# Altium PCB STDC14 Breakout.PcbDoc
Units mil, origin at the board's own origin, x right, y up, seen from the top; angles counter-clockwise.
Board outline 607 x 613 mil, 2 copper layers (Top Layer, Bottom Layer), stack 61.756 mil thick; 4 components, 14 nets, 28 pads, 0 vias.
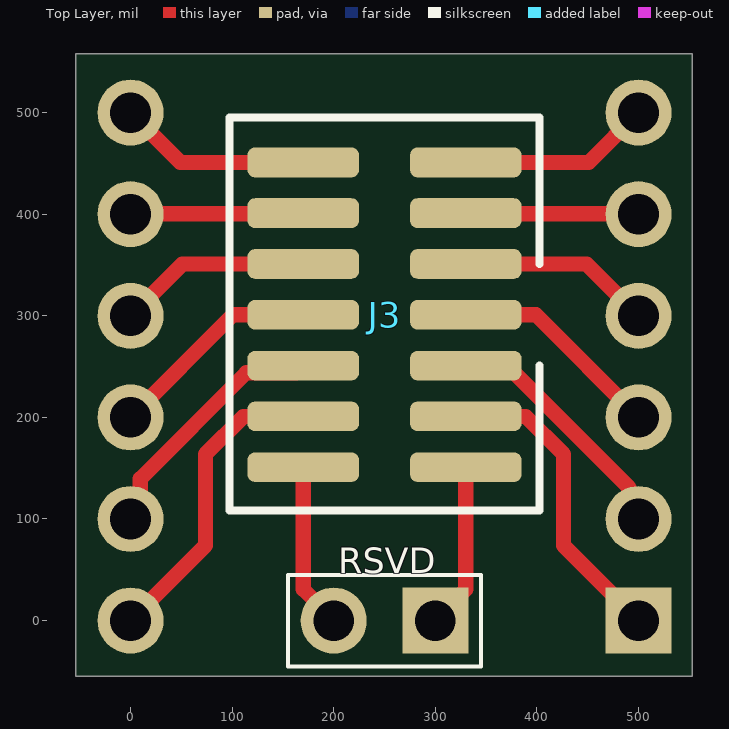
[diagram p0: Top Layer view]
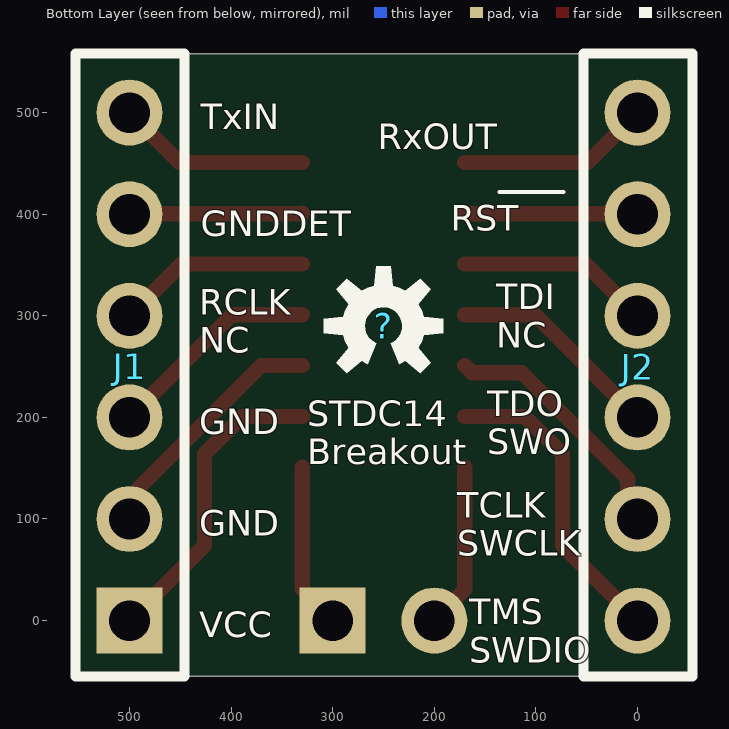
[diagram p1: Bottom Layer view, seen from below]

## Layer stack, top to bottom
Top Solder: solder mask 1, PSR-4000BN, Dk 4.5
Top Layer: signal copper 1.378
Dielectric 1: core 59, Kingboard KB6167F, Dk 4.5
Bottom Layer: signal copper 1.378
Bottom Solder: solder mask 1, PSR-4000BN, Dk 4.5

## Board outline
-54,-55 -54,558 553,558 553,-55

## Design rules (kind name [scope] priority, off if disabled: settings)
BoardOutlineClearance [All] p1: gap=7.87 ignorepadtopadclearanceinfootprint=FALSE
Clearance [All] p1: gap=5 ignorepadtopadclearanceinfootprint=FALSE except(9.84: Arc-Hole Track-Hole SMDPad-Hole THPad-Hole Via-Hole Fill-Hole Poly-Hole Region-Hole Text-Hole)
ComponentClearance [All] p1: gap=5 collisioncheckmode=3 verticalgap=5 showdistances=TRUE
DiffPairsRouting [All] p1: maxlimit=10 minlimit=5 mostfreqgap=5 toplayer_minwidth=5 toplayer_maxwidth=1000 toplayer_prefwidth=5 bottomlayer_minwidth=5 bottomlayer_maxwidth=1000 bottomlayer_prefwidth=5 maxuncoupledlength=500
Height [All] p1: minheight=0 maxheight=71497.94 prefheight=500
HoleSize [All] p1: absolutevalues=TRUE maxlimit=248.03 minlimit=11.81 maxpercent=80.000 minpercent=20.000
HoleToHoleClearance [All] p1: gap=9.84 allowstackedmicrovias=FALSE
MinimumAnnularRing [All] p1: minimumring=3
MinimumSolderMaskSliver [All] p1: minsoldermaskwidth=0
PlaneClearance [All] p1: clearance=5
PlaneConnect PlaneConnectPowerPads [InPadClass('PowerPads')] p1: planeconnectstyle=Direct reliefexpansion=20 reliefentries=4 reliefconductorwidth=10 reliefairgap=10
PlaneConnect [All] p2: pad.planeconnectstyle=Relief pad.reliefexpansion=11.81 pad.reliefentries=4 pad.reliefconductorwidth=5 pad.reliefairgap=5 via.planeconnectstyle=Direct via.reliefexpansion=11.81 via.reliefentries=4 via.reliefconductorwidth=5 via.reliefairgap=5
PolygonConnect PolygonConnectPowerPads [All vs (InPadClass('PowerPads'))] p1: connectstyle=Direct reliefconductorwidth=10 reliefentries=4 polygonreliefangle="90 Angle" airgapwidth=10
PolygonConnect [All] p2: thpad.connectstyle=Relief thpad.reliefconductorwidth=5 thpad.reliefentries=4 thpad.polygonreliefangle="90 Angle" thpad.airgapwidth=5 smdpad.connectstyle=Relief smdpad.reliefconductorwidth=5 smdpad.reliefentries=4 smdpad.polygonreliefangle="90 Angle" smdpad.airgapwidth=5 via.connectstyle=Direct via.reliefconductorwidth=5 via.reliefentries=4 via.polygonreliefangle="90 Angle" via.airgapwidth=5
RoutingVias [All] p1: holewidth=11.81 width=23.62 viastyle="Through Hole" minholewidth=11.81 minwidth=23.62 maxholewidth=23.62 maxwidth=259.84
SilkToSilkClearance [All] p1: silktosilkclearance=0
SilkToSolderMaskClearance [IsPad] p1: minsilkscreentomaskgap=5 clearancetoexposedcopper=TRUE
SolderMaskExpansion [All] p1: expansion=2.95 istentingtop=FALSE
Width [All] p1: maxlimit=1000 minlimit=5 preferedwidth=5 minimp=50.000000 maximp=50.000000 favimp=50.000000
20 further rules are at their usual default settings.

## Classes and differential pairs
component class "Top Sheet": J1 J2 J3

## Components (designator, comment, footprint, x,y, rotation, side; value= is the part's Value field where it differs from the comment)
? "Comment" OSHW-LOGO-S 250,290 r180 bottom
J1 "6 contacts Male header" PH1-06-UA#1 500,0 r90 bottom
J2 "6 contacts Male header" PH1-06-UA#2 0,0 r90 bottom
J3 "STDC14 Debug Connector" "FTSH-107-01-F-DV-K PLUGOUT" 250,251 r90 top

## Footprints (in the part's own frame and the unit in brackets; to place one, negate y for a bottom-side part, rotate by r counter-clockwise, add the part's x,y. Pads: shape width x height; smd on the part's side, far side on the other; paste and mask are expansions set on the pad)
"FTSH-107-01-F-DV-K PLUGOUT" [mil]
  rrect50% 29.13x109.84 smd: 1(-100,-80) 2(-100,80) 3(-50,-80) 4(-50,80) 5(0,-80) 6(0,80) 7(50,-80) 8(50,80) 9(100,-80) 10(100,80)
  rrect50% 29.5x109.84 smd: 11(150,-80) 12(150,80) 13(200,-80) 14(200,80)
  silkscreen extent -143,-153 244,153, body extent -207,-115 308,310, height 315
OSHW-LOGO-S [mil]
  silkscreen extent -59,-47 59,59
PH1-06-UA#1 [mil]
  rect 65x65 hole 40: 1(0,0)
  round 65 hole 40: 2(100,0) 3(200,0) 4(300,0) 5(400,0) 6(500,0)
  silkscreen extent -55,-54 558,53, body extent -50,-49 550,49, height 335
PH1-06-UA#2 [mil]
  round 65 hole 40: 1(0,0) 2(100,0) 3(200,0) 4(300,0) 5(400,0) 6(500,0)
  silkscreen extent -55,-54 558,53, body extent -50,-49 550,49, height 335

## Part data
J1 J2: library part PH1-06-UA, "Connector Male Header 1X6 6contacts 0.100in pitch Gold Flash", Manufacturer="Adam Tech", PCB Package="1x6 THT", Supplier Part Number 1=2057-PH1-06-UA-ND, ComponentLink1Description="Manufacturer Website", ComponentLink1URL=http://www.adam-tech.com/, ComponentLink2Description="Component Datasheet", ComponentLink2URL=http://www.adam-tech.com/downloader.php?p=PH1-XX-UA.pdf, Contact Finish=Gold, Description in Visual="Con Hdr Male 6contacts vertical 1x6", Gender=Male, Manufacturer P/N=PH1-06-UA, Number of Contacts=6, Number of Rows=1, Orientation=vertical, P/N=PH1-06-UA, Pitch=0.100in, Supplier 1=Digi-Key, Supplier 2=Digi-Key, Supplier Part Number 2=732-5319-ND
J3: library part STDC14-Debug, "STDC14 Debug Connector (ST Micro extension to the Cortex 10 Pin), 0.050\" (1.27mm) Pitch", Manufacturer=Samtec, Manufacturer P/N=FTSH-107-01-F-DV-K, Supplier Part Number 1=SAM13170TR-ND, ComponentLink1Description="Pinout Reference", ComponentLink1URL=https://www.st.com/resource/en/user_manual/dm00526767-stlinkv3set-debuggerprogrammer-for-stm8-and-stm32-stmicroelectronics.pdf, ComponentLink2Description="Datasheet for Connector", ComponentLink2URL=http://suddendocs.samtec.com/catalog_english/ftsh_smt.pdf, Contact Finish=Gold, Description in Visual="STDC14 Debug Connector (ST Micro extension to the Cortex 10 Pin), 0.050\" (1.27mm) Pitch", Gender=Male, Number of Contacts=14, Number of Rows=2, Orientation=Vertical, P/N=STDC14-Debug, Pitch="0.050\"", Supplier 1=Digi-Key, Supplier 2=Digi-Key, Supplier 3=Digi-Key, Supplier Part Number 2=612-FTSH-107-01-F-DV-K-ND, Supplier Part Number 3=FTSH-107-01-F-DV-K-P-ND

## Free pads (board coordinates)
  rect 65x65 hole 40: 1(300,0)
  round 65 hole 40: 2(200,0)

## Nets (pads, with @x,y where several pads share a name; then routed paths per layer and width w, separated by ;. In a path a pad name is that pad's centre, name@x,y a point inside that pad or via, vN(x,y) a via of type N, cw(c..) or ccw(c..) an arc to the next point about the centre after c; other vN are vias at no path point)
\RST: J2.5 J3.12 | length 170.4
  Top Layer w15: J2.5 0.5,400.5 169.5,400.5 J3.12
GDT: J1.5 J3.11 | length 170.4
  Top Layer w15: J3.11 330.5,400.5 499.5,400.5 J1.5
GN1: J1.2 J3.5 | length 245.1
  Top Layer w15: J3.5 370.35,251 490.43,130.92 490.43,109.57 J1.2
GN2: J1.3 J3.7 | length 211.8
  Top Layer w15: J3.7 399,301 J1.3
NC1: J3.1 pad.1 | length 163.4
  Top Layer w15: pad.1 300,0.81 330,30.81 J3.1
NC2: J3.2 pad.2 | length 163.4
  Top Layer w15: J3.2 170,30.81 200,0.81 pad.2
RCK: J1.4 J3.9 | length 191.1
  Top Layer w15: J3.9 449,351 J1.4
RxO: J2.6 J3.14 | length 190.3
  Top Layer w15: J2.6 49,451 J3.14
TCK: J2.2 J3.6 | length 250.1
  Top Layer w15: J2.2 9.57,109.57 9.57,139.57 113.93,243.93 162.93,243.93 J3.6
TDI: J2.4 J3.10 | length 191.1
  Top Layer w15: J2.4 51,351 J3.10
TDO: J2.3 J3.8 | length 211.8
  Top Layer w15: J2.3 101,301 J3.8
TMS: J2.1 J3.4 | length 306
  Top Layer w15: J2.1 73.79,73.79 73.79,163.79 111,201 J3.4
TxI: J1.6 J3.13 | length 190.3
  Top Layer w15: J3.13 451,451 J1.6
VCC: J1.1 J3.3 | length 306
  Top Layer w15: J3.3 389,201 426.21,163.79 426.21,73.79 J1.1

## Silkscreen, mask and mechanical layers (free items; w line width, h text height)
Top Overlay:
  lines w4: 155,-45 155,45 345,45 345,-45 155,-45
  text "RSVD" at 204.28,46.72 h25
Bottom Overlay:
  lines w4: 73,422 136,422
  text "TxIN" at 430,483.5 h25
  text "RxOUT" at 255.7,463.71 h25
  text "RST" at 183.69,383.5 h25
  text "GNDDET" at 430,378.5 h25
  text "TDI / NC" at 139.18,268.71 h25
  text "RCLK / NC" at 431.49,263.71 h25
  text "GND" at 431.49,183.5 h25
  text "TDO / SWO" at 148.1,163.71 h25
  text "STDC14 / Breakout" at 324.88,153.71 h25
  text "GND" at 431.49,83.5 h25
  text "TCLK / SWCLK" at 177.62,63.71 h25
  text "VCC" at 431.49,-16.5 h25
  text "TMS / SWDIO" at 165.6,-41.29 h25
Board Outline:
  the board outline again, w1
CAM Title Block:
  drawing of 59 lines, arcs and shapes, not listed
  text "1" at -1544.29,7251.6 h48.36
  text "2" at 1198.83,7251.6 h48.36
  text "3" at 3951.96,7251.6 h48.36
  text "4" at 6697.58,7251.6 h48.36
  text "A" at -2817.46,6289.46 h48.36
  text "A" at 7983.26,6289.46 h48.36
  text "B" at -2812.46,4164.25 h48.36
  text "B" at 7987.43,4164.25 h48.36
  text "C" at -2813.3,2039.88 h48.36
  text "C" at 7986.6,2039.88 h48.36
  text "D" at -2815.8,-85.33 h48.36
  text "D" at 7984.1,-85.33 h48.36
  text "Title:" at 4394.69,-166.2 h65.87
  text "'.Pcb_File_Name_No_Path'" at 4744.88,-187.32 h63.36
  text "*" at 4644.83,-280.42 h32.52
  text "*" at 4644.83,-340.45 h32.52
  text "Desc:" at 4394.69,-352.96 h42.52
  text "*" at 4644.83,-400.48 h32.52
  text "Letter" at 4594.8,-548.06 h42.52
  text "Auth:" at 4995.01,-548.06 h42.52
  text "Proj:" at 6094.76,-548.06 h42.52
  text "Size:" at 4394.69,-553.06 h42.52
  text ".ProjAuth" at 5244.65,-570 h42.52
  text ".ProjShrtName" at 6295,-570 h42.52
  text "1" at 6394.92,-687.71 h37.52
  text "1" at 6695.08,-687.71 h37.52
  text "Date:" at 4394.69,-693.96 h37.52
  text "'.ModifiedDate'" at 4644.83,-693.96 h37.52
  text "Time:" at 5395.22,-693.96 h37.52
  text "'.ModifiedTime'" at 5605.34,-693.96 h37.52
  text "Sheet" at 6094.76,-693.96 h37.52
  text "of" at 6545,-693.96 h37.52
  text "Repo:" at 4394.69,-784 h37.52
  text ".ProjGitURL" at 4645,-785 h37.52
  text "File:" at 4394.69,-884.05 h37.52
  text "'.Pcb_File_Name'" at 4644.83,-884.05 h37.52
  text "1" at -1544.29,-1047.47 h48.36
  text "2" at 1198.83,-1047.47 h48.36
  text "3" at 3951.96,-1047.47 h48.36
  text "4" at 6697.58,-1047.47 h48.36